# Altium PCB Group29.PcbDoc
Units mm, origin at the board's own origin, x right, y up, seen from the top; angles counter-clockwise.
Board outline 155.83 x 90.81 mm, 2 copper layers (Top Layer, Bottom Layer); 64 components, 34 nets, 187 pads, 0 vias.
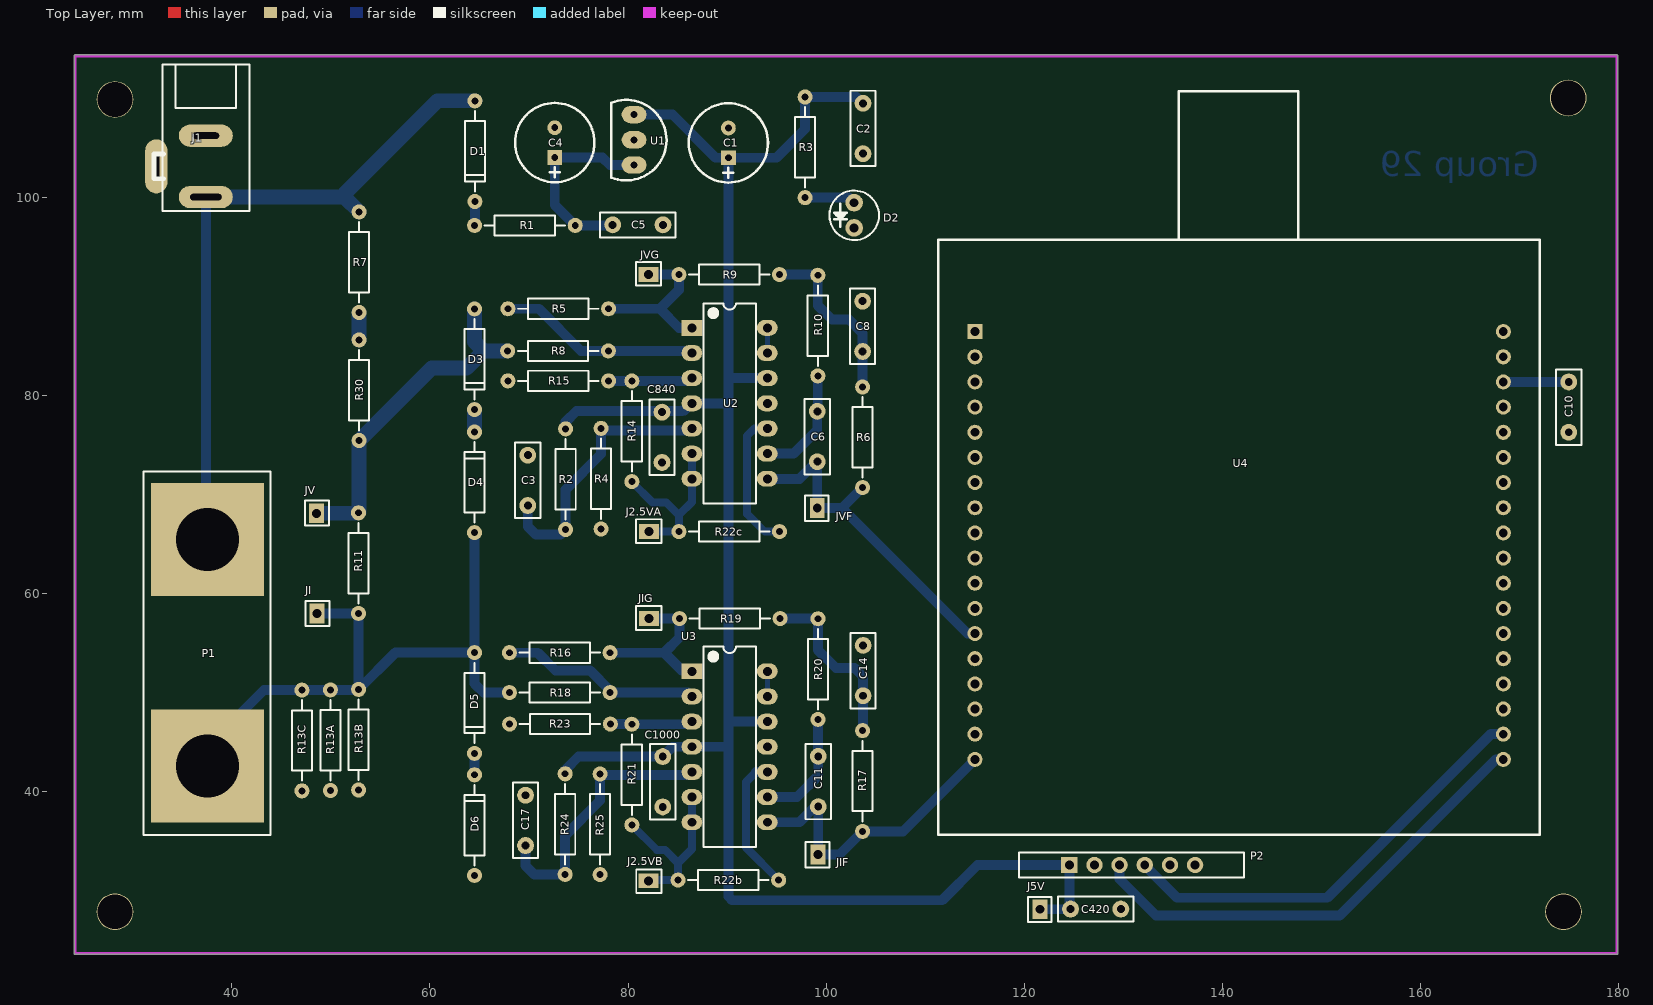
[diagram p0: Top Layer view]
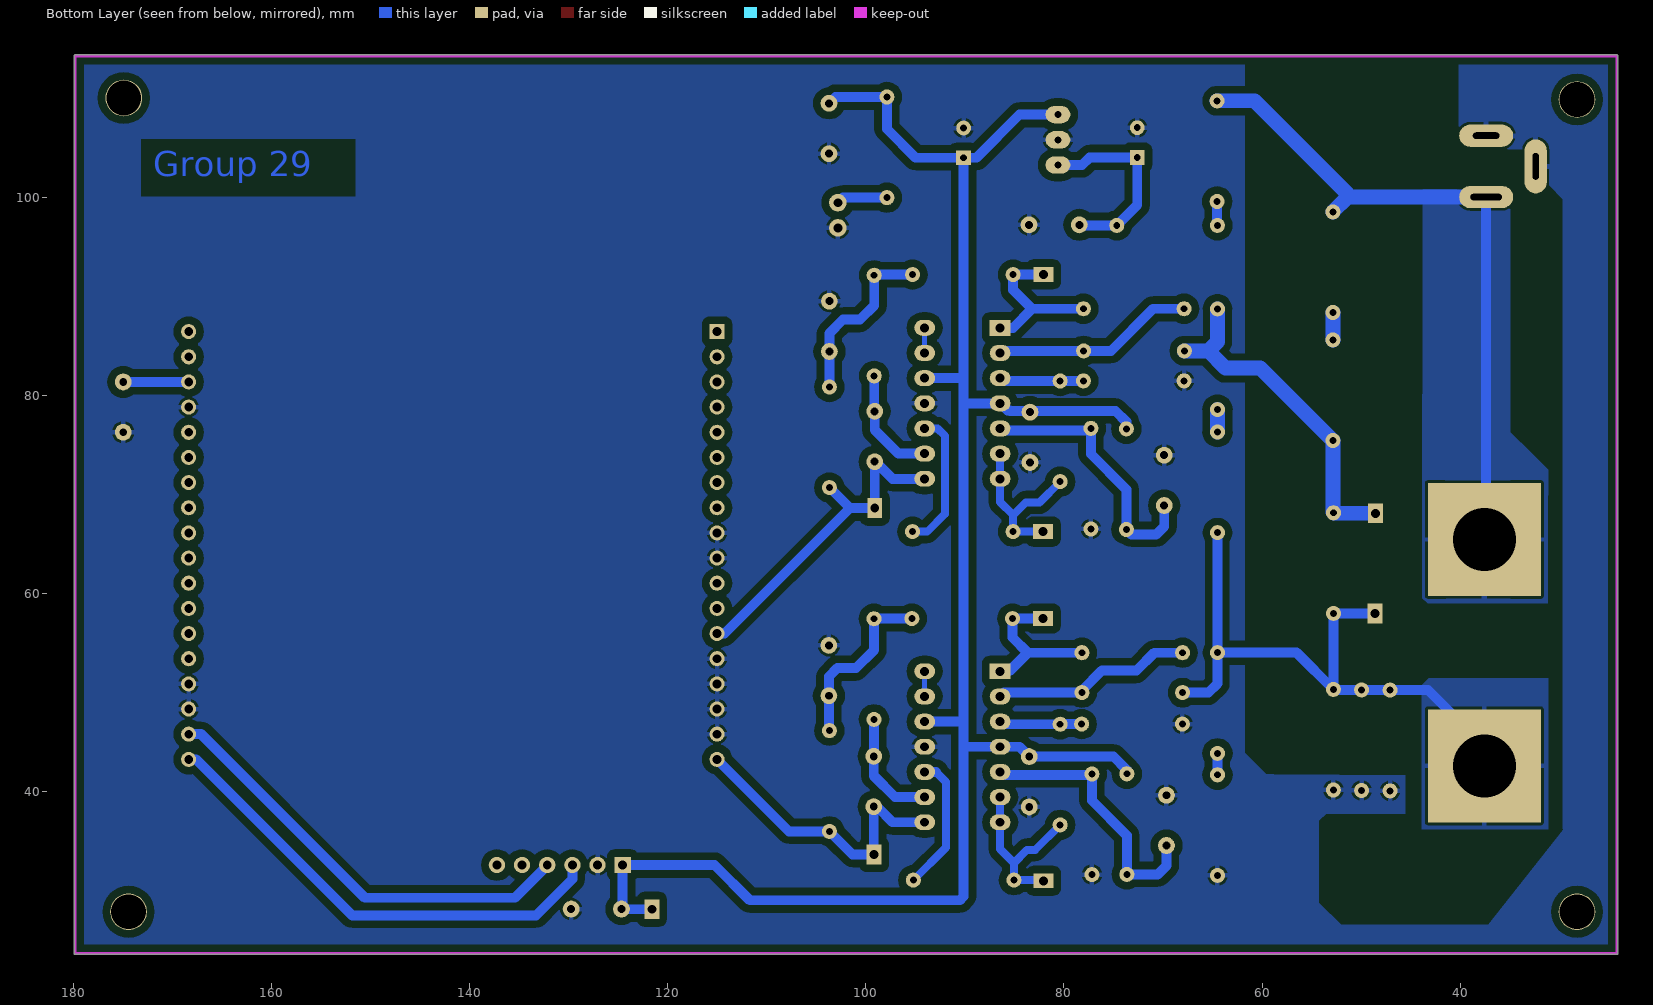
[diagram p1: Bottom Layer view, seen from below]

## Layer stack, top to bottom
Top Solder: solder mask 0.0102, Solder Resist, Dk 3.5
Top Layer: signal copper 0.0356
Dielectric 1: dielectric 0.32, FR-4, Dk 4.8
Bottom Layer: signal copper 0.0356
Bottom Solder: solder mask 0.0102, Solder Resist, Dk 3.5

## Board outline
24.101,23.791 cw(c24.211,23.855) 24.084,23.855 24.084,114.28 cw(c24.211,114.279) 24.211,114.406 179.786,114.406 cw(c179.786,114.279) 179.913,114.279 179.913,69.1 179.913,23.855 cw(c179.787,23.855) 179.896,23.791 cw(c179.788,23.728) 179.913,23.728 cw(c179.786,23.728) 179.786,23.601 24.211,23.601 cw(c24.211,23.728)

## Design rules (kind name [scope] priority, off if disabled: settings)
Clearance [All] p1: gap=0.5 ignorepadtopadclearanceinfootprint=FALSE
HoleSize [All] p1: absolutevalues=TRUE maxlimit=10 minlimit=0 maxpercent=80.000 minpercent=20.000
PlaneConnect [All] p1: planeconnectstyle=Relief reliefexpansion=0.508 reliefentries=4 reliefconductorwidth=0.5 reliefairgap=0.254
PolygonConnect [All] p1: connectstyle=Relief reliefconductorwidth=0.5 reliefentries=4 polygonreliefangle="90 Angle" airgapwidth=0.254
RoutingVias [All] p1: holewidth=0.711 width=1.27 viastyle="Through Hole" minholewidth=0.711 minwidth=1.27 maxholewidth=0.711 maxwidth=1.27
ShortCircuit [All] p1: allowed=TRUE
SilkToSilkClearance [All] p1: silktosilkclearance=0
SilkToSolderMaskClearance [IsPad] p1: minsilkscreentomaskgap=0 clearancetoexposedcopper=FALSE
SolderMaskExpansion [All] p1: expansion=0.102
Width [All] p1: maxlimit=2 minlimit=0.5 preferedwidth=1
25 further rules are at their usual default settings.

## Components (designator, comment, footprint, x,y, rotation, side; value= is the part's Value field where it differs from the comment)
C1 "47u" "CAP-RAD-3mm Pitch" 90.124,104.018 r90 top
C2 "10u" "FILM CAP-0.2" 103.713,106.972 r270 top
C3 "330n" "FILM CAP-0.2" 69.875,71.45 r90 top
C4 "100u" "CAP-RAD-3mm Pitch" 72.598,104.051 r90 top
C5 "33u" "FILM CAP-0.2" 80.98,97.245 r0 top
C6 "0.0015u" "FILM CAP-0.2" 99.1,75.875 r90 top
C8 "0.015u" "FILM CAP-0.2" 103.675,87 r90 top
C10 "" "FILM CAP-0.2" 174.96,78.846 r270 top
C11 "0.0015u" "FILM CAP-0.2" 99.2,41.05 r90 top
C14 "0.015u" "FILM CAP-0.2" 103.725,52.25 r90 top
C17 "330n" "FILM CAP-0.2" 69.65,37.125 r90 top
C420 "" "FILM CAP-0.2" 127.208,28.173 r0 top
C840 "" "FILM CAP-0.2" 83.425,75.8 r270 top
C1000 "47n" "FILM CAP-0.2" 83.5,41.025 r270 top
D1 "D" AXIAL-DIODE-0.4 64.53,104.686 r270 top
D2 "D" LED 102.824,99.479 r270 top
D3 "D" AXIAL-DIODE-0.4 64.5,83.675 r270 top
D4 "D" AXIAL-DIODE-0.4 64.5,71.25 r90 top
D5 "D" AXIAL-DIODE-0.4 64.5,48.975 r270 top
D6 "D" AXIAL-DIODE-0.4 64.5,36.65 r90 top
J1 "socket" AC-Socket 37.375,100.05 r270 top
J2.5VA "TEST PIN" ECE-HDR1TH 82.1,66.275 r270 top
J2.5VB "TEST PIN" ECE-HDR1TH 82.075,31.025 r90 top
J5V "TEST PIN" ECE-HDR1TH 121.6,28.15 r0 top
JI "TEST PIN" ECE-HDR1TH 48.6,58 r180 top
JIF "TEST PIN" ECE-HDR1TH 99.175,33.675 r0 top
JIG "TEST PIN" ECE-HDR1TH 82.1,57.5 r270 top
JV "TEST PIN" ECE-HDR1TH 48.55,68.125 r180 top
JVF "TEST PIN" ECE-HDR1TH 99.1,68.65 r0 top
JVG "TEST PIN" ECE-HDR1TH 82.075,92.25 r270 top
P1 "Dual Banana Plugs" "Dual Banana Plug" 37.55,54.05 r270 top
P2 "BlueTooth-Module" HDR1X6 124.541,32.618 r0 top
R1 "10" AXIAL-0.4 69.585,97.193 r0 top
R2 "10K" AXIAL-0.4 73.7,71.575 r90 top
R3 "150" AXIAL-0.4 97.871,105.067 r90 top
R4 "10K" AXIAL-0.4 77.275,71.625 r90 top
R5 "56k" AXIAL-0.4 72.95,88.775 r0 top
R6 "3.9k" AXIAL-0.4 103.675,75.8 r270 top
R7 "68K" AXIAL-0.4 52.85,93.475 r270 top
R8 "47K" AXIAL-0.4 72.925,84.525 r180 top
R9 "3.9k" AXIAL-0.4 90.2,92.225 r0 top
R10 "15k" AXIAL-0.4 99.15,87.075 r270 top
R11 "10K" AXIAL-0.4 52.786,63.098 r270 top
R13A "1" AXIAL-0.4 49.95,45.225 r270 top
R13B "1" AXIAL-0.4 52.8,45.275 r270 top
R13C "1" AXIAL-0.4 47.071,45.191 r270 top
R14 "56k" AXIAL-0.4 80.375,76.4 r90 top
R15 "56k" AXIAL-0.4 72.95,81.5 r180 top
R16 "56K" AXIAL-0.4 73.1,54.05 r0 top
R17 "3.9k" AXIAL-0.4 103.675,41.1 r270 top
R18 "10K" AXIAL-0.4 73.1,50.025 r0 top
R19 "3.9K" AXIAL-0.4 90.275,57.5 r0 top
R20 "15k" AXIAL-0.4 99.175,52.4 r270 top
R21 "56K" AXIAL-0.4 80.375,41.75 r90 top
R22b "1" AXIAL-0.4 90.124,31.094 r180 top
R22c "1" AXIAL-0.4 90.205,66.273 r180 top
R23 "10K" AXIAL-0.4 73.125,46.85 r180 top
R24 "10K" AXIAL-0.4 73.65,36.75 r270 top
R25 "10K" AXIAL-0.4 77.175,36.725 r90 top
R30 "22K" AXIAL-0.4 52.85,80.55 r90 top
U1 "LE50" ECE-REG-LE-TO-92 80.599,103.289 r270 top
U2 "MCP6024-I/P" DIP-14 90.251,79.227 r0 top
U3 "MCP6024-I/P" DIP-14 90.251,44.556 r0 top
U4 "ATmega328P Xplained" "ATmeg328P Xplained" 115.016,86.466 r0 top

## Footprints (in the part's own frame and the unit in brackets; to place one, negate y for a bottom-side part, rotate by r counter-clockwise, add the part's x,y. Pads: shape width x height; smd on the part's side, far side on the other; paste and mask are expansions set on the pad)
AC-Socket [mm]
  oval 2.25x5.45 hole 0.635 slot 3.175 at 90 deg: 1(0,0)
  oval 5.45x2.25 hole 0.635 slot 2.667 at 0 deg: 2(-3.1,-5)
  oval 2.25x5.45 hole 0.635 slot 2.667 at 90 deg: 3(-6.2,0)
  silkscreen extent -13.4,-5.25 1.4,4.4, body extent -13.4,-4.4 1.4,4.4, height 10
"ATmeg328P Xplained" [mil]
  rect 60x60 hole 35: 1(0,0)
  round 60 hole 35: 2(0,-100) 3(0,-200) 4(0,-300) 5(0,-400) 6(0,-500) 7(0,-600) 8(0,-700) 9(0,-800) 10(0,-900) 11(0,-1000) 12(0,-1100) 13(0,-1200) 14(0,-1300) 15(0,-1400) 16(0,-1500) 17(0,-1600) 18(0,-1700) 19(2100,-1700) 20(2100,-1600) 21(2100,-1500) 22(2100,-1400) 23(2100,-1300) 24(2100,-1200) 25(2100,-1100) 26(2100,-1000) 27(2100,-900) 28(2100,-800) 29(2100,-700) 30(2100,-600) 31(2100,-500) 32(2100,-400) 33(2100,-300) 34(2100,-200) 35(2100,-100) 36(2100,0)
  silkscreen extent -145,-2000 2245,955, body extent -145,-2000 2245,955, height 236
AXIAL-0.4 [mil]
  round 60 hole 27.56: 1(-200,0) 2(200,0)
  silkscreen extent -160,-40 160,40, body extent -120,-40 120,40, height 81
AXIAL-DIODE-0.4 [mil]
  round 60 hole 27.56: 1(-200,0) 2(200,0)
  silkscreen extent -160,-40 160,40, body extent -120,-41 120,41, height 82
"CAP-RAD-3mm Pitch" [mm]
  rect 1.5x1.5 hole 0.7: 1(0,0)
  round 1.5 hole 0.7: 2(3,0)
  silkscreen extent -2.5,-4 5.5,4, body extent -2.47,-3.99 5.5,3.99, height 10
DIP-14 [mm] "DIP; 14 Leads; Row Spacing 7.62 mm; Pitch 2.54 mm"
  rect 2.1x1.6 hole 0.9: 1(-3.81,7.62)
  oval 2.1x1.6 hole 0.9: 2(-3.81,5.08) 3(-3.81,2.54) 4(-3.81,0) 5(-3.81,-2.54) 6(-3.81,-5.08) 7(-3.81,-7.62) 8(3.81,-7.62) 9(3.81,-5.08) 10(3.81,-2.54) 11(3.81,0) 12(3.81,2.54) 13(3.81,5.08) 14(3.81,7.62)
  silkscreen extent -2.65,-10.1 2.65,10.1, body extent -3.6,-10.1 3.6,10.1, height 5.1
"Dual Banana Plug" [mm] "Connector; 2 Position"
  rect 11.43x11.43 hole 6.35: 1(-11.43,0) 2(11.43,0)
  silkscreen extent -18.29,-6.48 18.41,6.35, body extent -17.38,-5.99 17.43,5.99, height 5.5
ECE-HDR1TH [mm] "Test Pin"
  rect 1.5x2 hole 0.9: 1(0,0)
  silkscreen extent -1.25,-1.29 1.15,1.25
ECE-REG-LE-TO-92 [mm] "Regulator LE50"
  oval 1.75x2.5 hole 0.7: 1(0,0) 2(-2.54,0) 3(-5.08,0)
  silkscreen extent -6.57,-2.29 1.55,3.28
"FILM CAP-0.2" [mm]
  round 1.7 hole 0.8: 1(-2.54,0) 2(2.54,0)
  silkscreen extent -3.81,-1.27 3.81,1.27, body extent -3.81,-1.27 3.81,1.27, height 6
HDR1X6 [mil] "Connector; Header; 6 Position"
  rect 65x65 hole 35.43: 1(0,0)
  round 65 hole 35.43: 2(100,0) 3(200,0) 4(300,0) 5(400,0) 6(500,0)
  silkscreen extent -200,-50 695,50
LED [mil]
  round 70 hole 35.43: 1(0,0) 2(100,0)
  silkscreen extent -48,-98 148,98

## Part data
C1 C4: library part "Cap Pol (22uF-100uF)", "Polarized Capacitor (Axial)"
C2 C3 C5 C6 C8 C10 C11 C14 C17 C420 C840 C1000: library part CAP, "Capacitor Non Polarised Through Hole"
D1: library part Diode
D2: library part LED, "Typical GaAs LED"
D3 D4 D5 D6: library part Zener, "Zener Diode"
J1: library part "AC Input", "DC socket"
J2.5VA J2.5VB J5V JI JIF JIG JV JVF JVG: library part CON000017
P1: "M6 Holes"
P2: "Header, 6-Pin"
R1 R2 R3 R4 R5 R6 R7 R8 R9 R10 R11 R13A R13B R13C R14 R15 R16 R17 R18 R19 R20 R21 R22b R22c R23 R24 R25 R30: library part Res, "Through Hole Resistor"
U1: "Voltage Regulator"
U2 U3: "Rail-to-Rail Input/Output, 10 MHz Operational Amplifier, 14-Pin PDIP, Industrial Temperature"
U4: "Header, 18-Pin, Dual row"

## Free pads (board coordinates)
  round 3.7 hole 3.5: 2(28.2,109.9) 4(174.9,110.05) 5(28.2,27.9) 6(174.425,27.9)

## Nets (pads, with @x,y where several pads share a name; then routed paths per layer and width w, separated by ;. In a path a pad name is that pad's centre, name@x,y a point inside that pad or via, vN(x,y) a via of type N, cw(c..) or ccw(c..) an arc to the next point about the centre after c; other vN are vias at no path point)
2V5A: J2.5VA.1 R14.1 R22c.2 U2.6 U2.7 | length 17.6
  Bottom Layer w0.8: R14.1 82.47,69.225 83.85,69.225 85.125,67.95 ; J2.5VA.1@82.102,66.273 R22c.2 85.125,67.95 ; R22c.2@85.423,66.275 R22c.2@85.425,66.273 ; U2.6 U2.7 86.441,69.266 85.125,67.95
2V5Aj: R22c.1 U2.10 | length 14.3
  Bottom Layer w0.8: U2.10 92.755,76.687 92.011,75.943 92.011,68.069 93.807,66.273 R22c.1
2V5B: J2.5VB.1 R21.1 R22b.2 U3.6 U3.7 | length 18.1
  Bottom Layer w0.8: R21.1@80.375,36.595 R21.1 82.895,34.15 83.725,34.15 ; J2.5VB.1@82.144,31.094 R22b.2 85.044,32.831 ; 83.8,34.075 85.044,32.831 ; U3.6 U3.7 86.441,34.228 85.044,32.831
2V5Bj: R22b.1 U3.10 | length 13.9
  Bottom Layer w0.8: 92.918,42.016 91.902,41 91.902,34.396 R22b.1
  Bottom Layer w1: 92.918,42.016 U3.10
5V: C1.1 C2.1 C420.1 C840.1 C1000.1 J5V.1 P2.1 R2.2 R3.2 R24.1 U1.3 U2.4 U2.12 U3.4 U3.12 | length 190.5
  Bottom Layer w1: R24.1 73.65,42.225 74.992,43.567 83.498,43.567 C1000.1 84.491,44.556 U3.4 90.124,44.556 ; R2.2 73.7,77.375 74.792,78.467 85.425,78.467 85.425,78.487 85.701,78.487 U2.4 90.124,79.227 ; U1.3 84.481,108.369 88.832,104.018 C1.1 ; U3.12 90.251,47.096 90.124,46.969 ; U2.12 90.251,81.767 90.124,81.64 ; 103.078,110.147 R3.2 97.871,106.921 94.968,104.018 C1.1 ; J5V.1 124.645,28.15 C420.1 ; C420.1@124.541,28.3 P2.1 115.27,32.618 111.714,29.062 90.505,29.062 90.124,29.443 90.124,44.556 ; 90.124,44.556 90.124,46.969 ; 90.124,46.969 90.124,79.227 ; 90.124,79.227 90.124,81.64 ; 90.124,81.64 C1.1
AREF: C10.1 U4.34 | length 6.6
  Bottom Layer w1: U4.34 C10.1
GND: C1.2 C2.2 C3.2 C4.2 C5.2 C8.2 C10.2 C14.2 C17.2 C420.2 C840.2 C1000.2 D2.2 D6.1 J1.2 J1.3 P2.2 R4.1 R13A.2 R13B.2 R13C.2 R15.2 R23.2 R25.1 U1.2 U2.11 U3.11 U4.9 U4.10 U4.14 U4.15 U4.16 U4.17 U4.21 U4.22 U4.33
I_sense: D4.1 D5.1 JI.1 P1.2 R11.2 R13A.1 R13B.1 R13C.1 R18.1 | length 64.8
  Bottom Layer w1: P1.2@35.514,42.524 43.261,50.271 R13C.1 ; R13C.1@47.125,50.325 R13C.1 ; JI.1 52.768,58 R11.2 52.786,50.369 R13B.1 ; D4.1 D5.1 ; R18.1 65.4,50.025 64.5,50.925 D5.1 ; R13C.1 49.916,50.271 R13A.1 52.75,50.305 R13B.1 ; R13B.1 56.5,54.055 D5.1
Imeas: C11.1 JIF.1 R17.2 U3.8 U4.18 | length 30.4
  Bottom Layer w1: U3.8 97.311,36.936 98.885,38.51 C11.1 JIF.1@99.2,33.7 ; JIF.1 101.33,33.675 R17.2 107.75,36.02 U4.18
NetC3_1: C3.1 R2.1 R4.2 U2.5 | length 27.6
  Bottom Layer w1: C3.1 69.875,66.8 70.675,66 73.205,66 R2.1 73.7,70.525 77.275,74.1 R4.2 77.49,76.49 86.441,76.49 U2.5
NetC4_1: C4.1 C5.1 R1.2 U1.1 | length 19.8
  Bottom Layer w1: C5.1 78.388,97.193 R1.2 72.598,99.26 C4.1 77.399,104.051 78.161,103.289 U1.1
NetC6_2: C6.2 R10.2 U2.9 | length 11.4
  Bottom Layer w1: U2.9 96.722,74.147 99.1,76.525 C6.2 ; C6.2@99.15,78.465 R10.2
NetC8_1: C8.1 R6.1 R9.2 R10.1 | length 18
  Bottom Layer w1: R9.2 R10.1@99.08,92.225 ; R10.1 99.15,89.1 100.575,87.675 102.3,87.675 103.675,86.3 C8.1 R6.1
NetC11_2: C11.2 R20.2 U3.9 | length 11.7
  Bottom Layer w1: U3.9 97.051,39.476 99.2,41.625 C11.2 ; C11.2@99.175,43.615 R20.2
NetC14_1: C14.1 R17.1 R19.2 R20.1 | length 18.1
  Bottom Layer w1: R19.2 99.155,57.5 R20.1 99.175,54.3 100.975,52.5 102.875,52.5 103.725,51.65 C14.1 R17.1@103.725,46.23
NetC17_1: C17.1 R24.2 R25.2 U3.5 | length 27.5
  Bottom Layer w1: C17.1 69.65,32.55 70.53,31.67 R24.2 73.65,35.6 77.175,39.125 R25.2@77.175,41.715 ; R25.2 R25.2@77.175,41.715 ; R25.2@77.275,41.805 R25.2@77.361,41.891 ; U3.5 86.14,41.715 R25.2@77.175,41.715
NetD1_2: D1.2 R1.1 | length 2.4
  Bottom Layer w1: R1.1 64.53,97.218 D1.2
NetD2_1: D2.1 R3.1 | length 5.2
  Bottom Layer w1: R3.1 102.316,99.987 D2.1
NetD3_2: D3.2 D4.2 | length 2.3
  Bottom Layer w1.5: D4.2 D3.2
NetD5_2: D5.2 D6.2 | length 2.2
  Bottom Layer w1: D6.2 D5.2
NetJIG_1: JIG.1 R16.2 R19.1 U3.1 | length 16.2
  Bottom Layer w1: R16.2 83.65,54.05 ; JIG.1 R19.1 85.195,55.595 83.65,54.05 ; U3.1 85.524,52.176 83.65,54.05
NetJVG_1: JVG.1 R5.2 R9.1 U2.1 | length 16.5
  Bottom Layer w1: R5.2 83.225,88.775 ; JVG.1@82.1,92.225 R9.1 85.12,90.67 83.225,88.775 ; U2.1 85.153,86.847 83.225,88.775
NetR5_1: R5.1 R8.1 U2.2 | length 20.4
  Bottom Layer w1: R5.1 71,88.775 75.25,84.525 R8.1 86.223,84.525 U2.2
NetR7_2: R7.2 R30.2 | length 2.8
  Bottom Layer w1.5: R30.2 R7.2
NetR14_2: R14.2 R15.1 U2.3 | length 8.5
  Bottom Layer w1: R15.1 80.355,81.5 R14.2 86.154,81.48 U2.3
NetR16_1: R16.1 R18.2 U3.2 | length 20.4
  Bottom Layer w1: R16.1 70.875,54.05 72.675,52.25 76.175,52.25 78.18,50.245 R18.2 86.052,50.025 U3.2
NetR21_2: R21.2 R23.1 U3.3 | length 8.4
  Bottom Layer w1: R23.1 R21.2@80.28,46.85 ; R21.2@80.355,46.85 R21.2@80.28,46.85 ; U3.3 86.175,46.83 R21.2 80.3,46.83 R21.2@80.28,46.85
NetU2_13: U2.13 U2.14 | length 2.5
  Bottom Layer w0.5: U2.13 U2.14
NetU3_13: U3.13 U3.14 | length 2.5
  Bottom Layer w0.5: U3.13 U3.14
RXD: P2.3 U4.19 | length 48.2
  Bottom Layer w1: P2.3 129.621,31.221 133.304,27.538 151.846,27.538 167.594,43.286 U4.19
TXD: P2.4 U4.20 | length 44.4
  Bottom Layer w1: P2.4@132.161,32.576 135.421,29.316 150.576,29.316 167.086,45.826 U4.20
V_sense: D3.1 JV.1 R8.2 R11.1 R30.1 | length 35
  Bottom Layer w1: R11.1@52.733,68.125 R11.1 R11.1@52.85,68.242 ; R8.2@67.795,84.475 R8.2
  Bottom Layer w1.5: JV.1 R11.1@52.733,68.125 ; R11.1@52.85,68.242 R30.1 60.18,82.8 63.7,82.8 65.425,84.525 ; D3.1 64.5,85.45 65.425,84.525 ; R8.2 65.425,84.525
Vin: D1.1 J1.1 P1.1 R7.1 | length 69
  Bottom Layer w1: P1.1@35.26,65.384 37.375,67.499 J1.1 ; 51.355,100.05 51.355,100.355
  Bottom Layer w1.5: J1.1 51.355,100.05 R7.1 ; 51.355,100.355 60.766,109.766 D1.1
Vmeas: C6.1 JVF.1 R6.2 U2.8 U4.13 | length 34.5
  Bottom Layer w1: U2.8 97.307,71.607 99.035,73.335 C6.1 JVF.1 101.605,68.65 ; R6.2 101.605,68.65 ; U4.13 114.269,55.986 101.605,68.65
pads on no net: P2.5 P2.6 U4.1 U4.2 U4.3 U4.4 U4.5 U4.6 U4.7 U4.8 U4.11 U4.12 U4.23 U4.24 U4.25 U4.26 U4.27 U4.28 U4.29 U4.30 U4.31 U4.32 U4.35 U4.36

## Polygon pours and split planes (outlines as drawn)
GND on Bottom Layer "Bottom Layer-GND" (solid, remove dead copper, pour order 5): 24.211,114.279 24.211,23.728 179.786,23.728 179.786,114.279
Vin on Bottom Layer "VIN_L02_P030" (solid, remove dead copper, pour order 30): 30.991,72.453 36.732,78.05 41.55,78.05 41.475,57.225 41.55,57.15 41.5,57.1 31.15,57.1 31.15,69.9 30.97,70.08 30.964,70.236
Vin on Bottom Layer "VIN_L02_P026" (solid, remove dead copper, pour order 26): 34.925,57.1 44,57.1 44,101.225 34.925,101.225
I_sense on Bottom Layer "I_sense" (solid, remove dead copper, pour order 24): 30.95,51.658 30.95,36.25 43.852,36.25 43.852,50.771 43.069,51.559

## Keep-outs
Keep-Out Layer:
  lines w0.254: 179.786,23.728 24.206,23.728 24.206,114.279 179.786,114.279 179.786,23.855

## Other copper
Bottom Layer:
  pour cut-out: 29.608,36.155 44.55,36.15 44.55,26.6 44.525,26.575 37.143,26.575
  pour cut-out: 45.55,26.575 51.325,26.575 51.325,37.8 45.55,37.8
  pour cut-out: 45.55,41.925 45.55,26.575 44.525,26.575 44.525,41.9 44.5,41.925
  pour cut-out: 44.05,41.675 44.05,49.35 44.467,48.933 58.825,48.933 58.825,41.805
  pour cut-out: 33.752,104.859 40.15,104.859 40.15,100.856 40.094,100.8 33.775,100.8
  pour cut-out: 34.169,76.607 34.097,76.607 30.654,73.165 31.085,72.734 31.085,36.155 29.62,36.155 29.6,36.175 29.62,36.195 29.62,99.845 31.225,101.45 34.024,101.45 34.15,101.475
  pour cut-out: 43.977,51.468 30.704,51.468 30.73,51.494 30.73,59.025 43.275,59.025 43.975,59.725
  pour cut-out: 43.786,100.825 40.35,100.825 40.15,101.025 40.15,114.625 43.675,114.625 43.725,114.675
  pour cut-out: 43.776,114.225 61.725,114.225 61.725,47.35 59.856,45.481 59.244,46.002 43.82,51.675
  pour cut-out: 58.825,48.933 58.835,48.923 61.725,48.923 61.725,43.945 59.585,41.805 58.825,41.805
  pour cut-out: 51.325,37.8 53.533,37.8 54.25,37.083 54.25,28.813 52.012,26.575 51.325,26.575
  text "Group 29" at 171.925,102.175 h2.5